# Altium PCB PCB1.PcbDoc
Units mil, origin at the board's own origin, x right, y up, seen from the top; angles counter-clockwise.
Board outline 945 x 665 mil, 2 copper layers (Top Layer, Bottom Layer); 7 components, 6 nets, 20 pads, 0 vias.
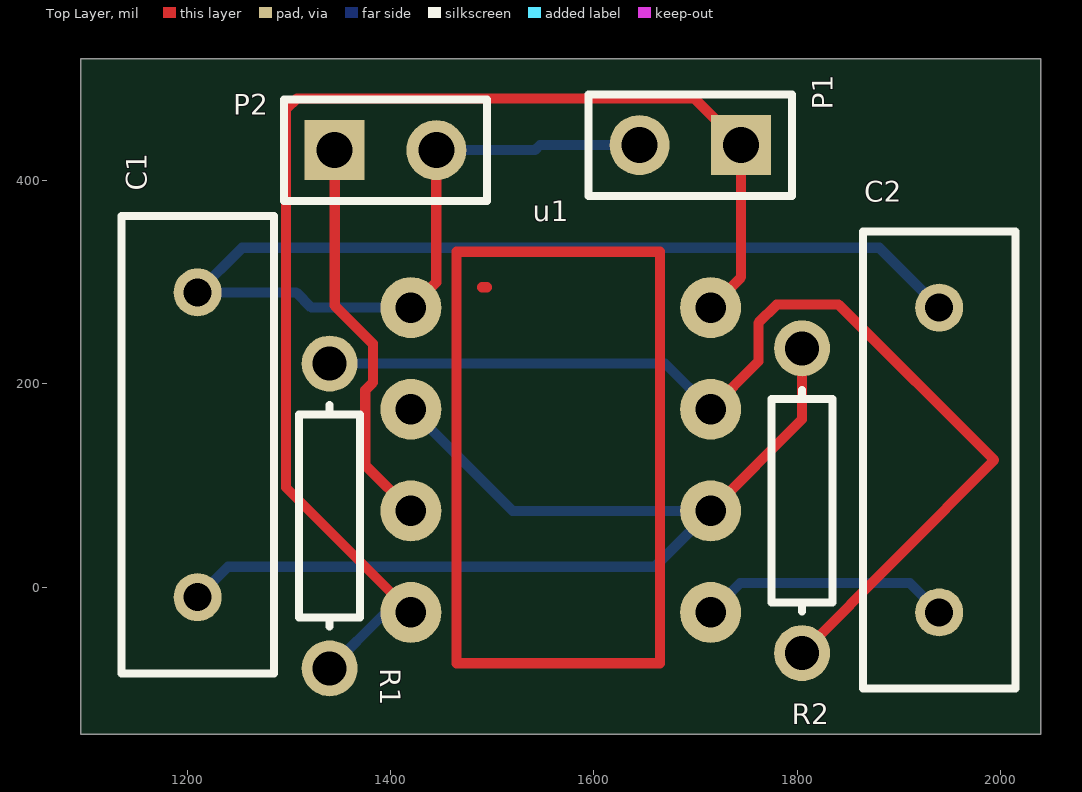
[diagram p0: Top Layer view]
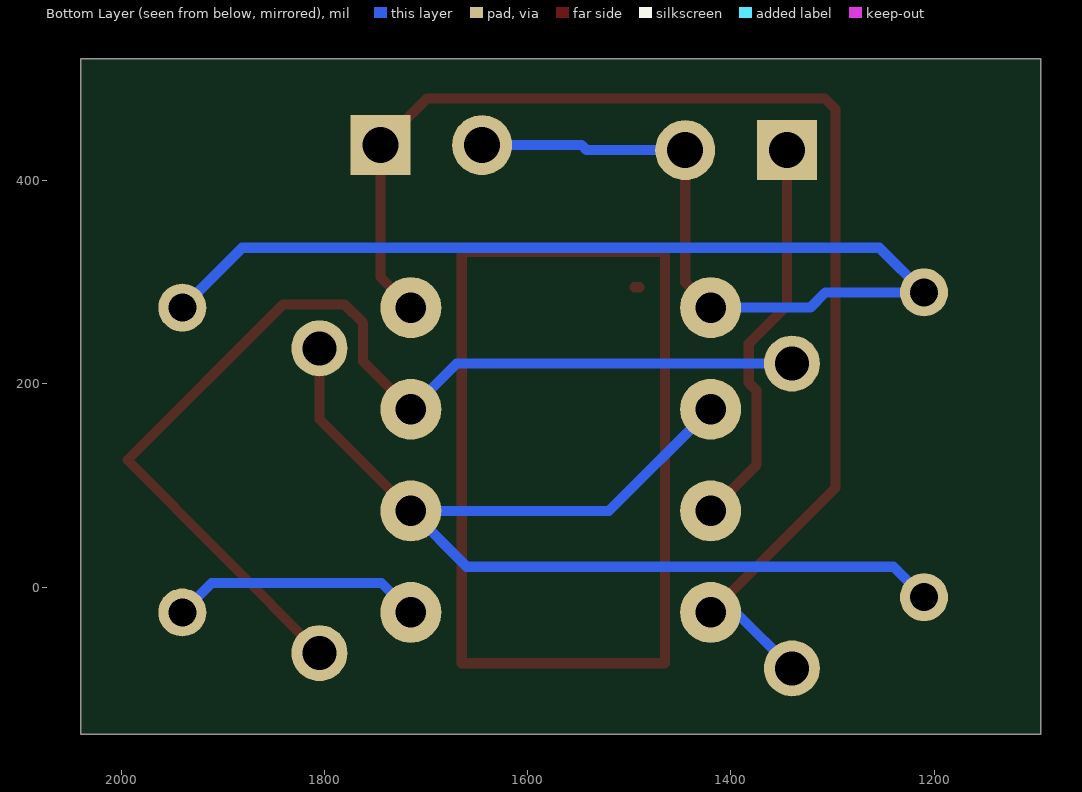
[diagram p1: Bottom Layer view, seen from below]

## Layer stack, top to bottom
Top Solder: solder mask 0.4, Solder Resist, Dk 3.5
Top Layer: signal copper 1.4
Dielectric 1: dielectric 12.6, FR-4, Dk 4.8
Bottom Layer: signal copper 1.4
Bottom Solder: solder mask 0.4, Solder Resist, Dk 3.5

## Board outline
1095,-145 1095,520 1570,520 2040,520 2040,-145

## Design rules (kind name [scope] priority, off if disabled: settings)
Clearance [All] p1: gap=10
PolygonConnect [All] p1: connectstyle=Relief reliefconductorwidth=10 reliefentries=4 polygonreliefangle="90 Angle" airgapwidth=10
RoomDefinition Sheet1 [InComponentClass('Sheet1')] p1: confinementstyle=ConfineIn formatcopy=TRUE lockcomponents=FALSE outline 1095,-145 2040,-145 2040,520 1095,520
RoutingVias [All] p1: holewidth=28 width=50 viastyle="Through Hole" minholewidth=28 minwidth=50 maxholewidth=28 maxwidth=50
SilkToSolderMaskClearance [IsPad] p1: minsilkscreentomaskgap=7 clearancetoexposedcopper=TRUE
SolderMaskExpansion [All] p1: expansion=4
Width [All] p1: maxlimit=10 minlimit=10 preferedwidth=10
29 further rules are at their usual default settings.

## Components (designator, comment, footprint, x,y, rotation, side; value= is the part's Value field where it differs from the comment)
C1 "Cap" RAD-0.3 1210,140 r270 top
C2 "Cap" RAD-0.3 1940,125 r270 top
P1 "Header 2" HDR1X2 1745,435 r180 top
P2 "Header 2" HDR1X2 1345,430 r0 top
R1 "Res1" AXIAL-0.3 1340,70 r270 top
R2 "Res1" AXIAL-0.3 1805,85 r270 top
u1 "LM555CM" LM555CM 1310,-25 r0 top

## Footprints (in the part's own frame and the unit in brackets; to place one, negate y for a bottom-side part, rotate by r counter-clockwise, add the part's x,y. Pads: shape width x height; smd on the part's side, far side on the other; paste and mask are expansions set on the pad)
AXIAL-0.3 [mm] "Axial Device, Thru-Hole; 2 Leads; 0.3 in Pin Spacing"
  round 1.4 hole 0.85: 1(-3.81,0) 2(3.81,0)
  silkscreen extent -2.77,-0.76 2.77,0.76
HDR1X2 [mm] "Connector; Header; 2 Position"
  rect 1.5x1.5 hole 0.9: 1(0,0)
  round 1.5 hole 0.9: 2(2.54,0)
  silkscreen extent -1.27,-1.27 3.81,1.27
LM555CM [mil] "LM555CM IC"
  round 60 hole 30: 1(110,300) 2(110,200) 3(110,100) 4(110,0) 5(405,0) 6(405,100) 7(405,200) 8(405,300)
  Top Layer lines w10: 180,320 185,320 ; 155,-50 355,-50 355,355 155,355 155,-50
RAD-0.3 [mm] "Radial Cap, Thru-Hole; 2 Leads; 0.3 in Pin Spacing"
  round 1.2 hole 0.7: 1(-3.81,0) 2(3.81,0)
  silkscreen extent -5.71,-1.91 5.71,1.91

## Part data
C1 C2: "Capacitor"
P1 P2: "Header, 2-Pin"
R1 R2: "Resistor"
u1: "LM555CM IC"

## Nets (pads, with @x,y where several pads share a name; then routed paths per layer and width w, separated by ;. In a path a pad name is that pad's centre, name@x,y a point inside that pad or via, vN(x,y) a via of type N, cw(c..) or ccw(c..) an arc to the next point about the centre after c; other vN are vias at no path point)
GND: C1.1 C2.1 P1.2 P2.2 u1.1 | length 1356.3
  Top Layer w10: u1.1 1445,300 P2.2
  Bottom Layer w10: u1.1 1322,275 1307,290 C1.1 1254,334 1881,334 C2.1 ; P2.2 1542,430 1547,435 P1.2
NetC1_2: C1.2 R2.1 u1.2 u1.6 | length 1073.9
  Top Layer w10: u1.6 1805,165 R2.1
  Bottom Layer w10: C1.2 1240,20 1660,20 u1.6 1520,75 u1.2
NetC2_2: C2.2 u1.5 | length 249
  Bottom Layer w10: u1.5 1744,4 1911,4 C2.2
NetP2_1: P2.1 u1.3 | length 392.3
  Top Layer w10: P2.1 1345,277 1382.56,239.44 1382.56,201.2 1375,193.64 1375,120 u1.3
NetR1_1: R1.1 R2.2 u1.7 | length 1068.9
  Top Layer w10: u1.7 1762,222 1762,260 1780,278 1841,278 1994,125 R2.2
  Bottom Layer w10: R1.1 1670,220 u1.7
VCC10: P1.1 R1.2 u1.4 u1.8 | length 1292.8
  Top Layer w10: u1.4 1297,98 1297,470 1308,481 1699,481 P1.1 1745,305 u1.8
  Bottom Layer w10: R1.2 1395,-25 u1.4